# Altium PCB circular coli-6mm.PcbDoc
Units mil, origin at the board's own origin, x right, y up, seen from the top; angles counter-clockwise.
Board outline 668 x 417 mil, 4 copper layers (Top Layer, MidLayer1, MidLayer2, Bottom Layer); 1 components, 1 nets, 2 pads, 2 vias.
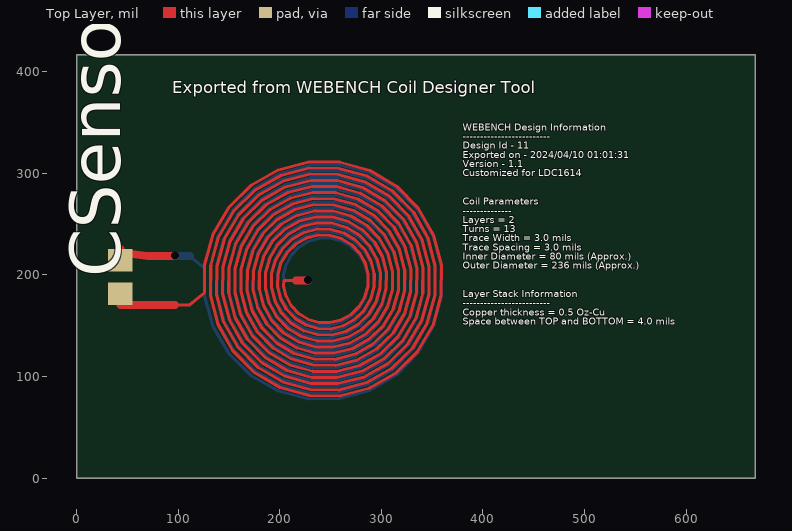
[diagram p0: Top Layer view]
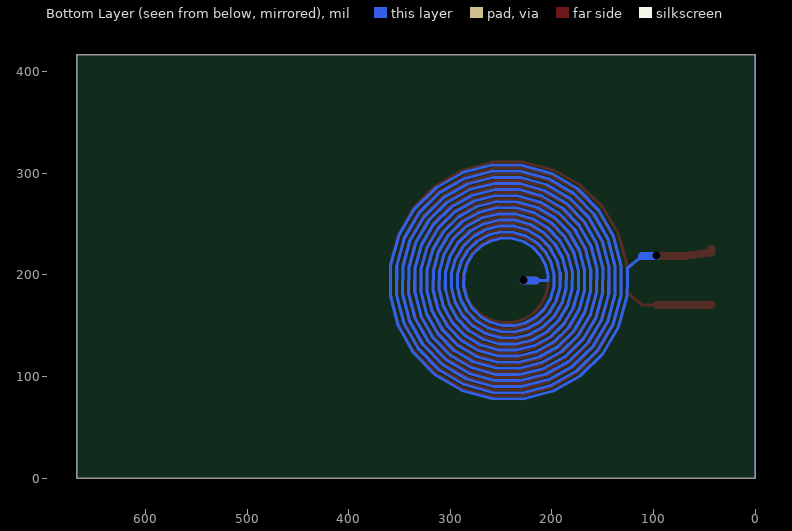
[diagram p1: Bottom Layer view, seen from below]

## Layer stack, top to bottom
Top Layer: signal copper 1.4
Dielectric: core 12.6, FR-4, Dk 4.8
MidLayer1: signal copper 1.4
Dielectric: prepreg 12.6, FR-4, Dk 4.8
MidLayer2: signal copper 1.4
Dielectric: core 12.6, FR-4, Dk 4.8
Bottom Layer: signal copper 1.4

## Board outline
0,0 668,0 668,417 0,417

## Design rules (kind name [scope] priority, off if disabled: settings)
PlaneConnect [All] p0: scope1count=1 scope1_0_kind=Board scope1_0_value=Board scope2count=1 scope2_0_kind=Board scope2_0_value=Board commentlength=0 planeconnectstyle=Direct reliefexpansion=20 reliefentries=4 reliefconductorwidth=10 reliefairgap=10
PlaneConnect [All] p1: planeconnectstyle=Direct reliefexpansion=20 reliefentries=4 reliefconductorwidth=10 reliefairgap=10
PolygonConnect [All] p0: scope1count=1 scope1_0_kind=Board scope1_0_value=Board scope2count=1 scope2_0_kind=Board scope2_0_value=Board commentlength=0 connectstyle=Direct reliefconductorwidth=10 reliefentries=4 polygonreliefangle="90 Angle"
PolygonConnect [All] p1: connectstyle=Direct reliefconductorwidth=10 reliefentries=4 polygonreliefangle="90 Angle"

## Components (designator, comment, footprint, x,y, rotation, side; value= is the part's Value field where it differs from the comment)
CSensor "" 0402 43,198 r90 top

## Footprints (in the part's own frame and the unit in brackets; to place one, negate y for a bottom-side part, rotate by r counter-clockwise, add the part's x,y. Pads: shape width x height; smd on the part's side, far side on the other; paste and mask are expansions set on the pad)
0402 [mil]
  rect 22x24 smd: 1(-16.5,0) 2(16.5,0)

## Via types
v1: diameter 0, hole 8, Top Layer to Bottom Layer, 2 vias

## Nets (pads, with @x,y where several pads share a name; then routed paths per layer and width w, separated by ;. In a path a pad name is that pad's centre, name@x,y a point inside that pad or via, vN(x,y) a via of type N, cw(c..) or ccw(c..) an arc to the next point about the centre after c; other vN are vias at no path point)
3: CSensor.1 CSensor.2 | length 13225.4
  Top Layer w3: 97.06,170.6 111.46,170.6 125.86,182.6 125.86,194.6 126.11,210.11 134.38,239.99 150.06,266.65 172.06,288.3 198.86,303.48 228.61,311.2 259.28,310.95 288.77,302.79 315.09,287.3 336.46,265.58 351.45,239.12 359.06,209.75 358.81,179.48 350.75,150.37 335.46,124.39 314.02,103.3 287.9,88.51 258.92,81 229.04,81.25 200.31,89.21 174.67,104.3 153.86,125.46 139.27,151.24 131.86,179.84 132.11,209.32 139.97,237.67 154.86,262.97 175.75,283.5 201.18,297.89 229.4,305.2 258.49,304.95 286.46,297.19 311.41,282.5 331.66,261.89 345.86,236.81 353.06,208.96 352.81,180.27 345.16,152.68 330.66,128.07 310.33,108.1 285.59,94.1 258.13,87 229.83,87.25 202.62,94.8 178.36,109.1 158.66,129.15 144.86,153.55 137.86,180.63 138.11,208.54 145.56,235.36 159.66,259.28 179.43,278.7 203.49,292.3 230.19,299.2 257.7,298.95 284.14,291.6 307.73,277.7 326.86,258.21 340.27,234.49 347.06,208.17 346.81,181.06 339.57,155 325.86,131.76 306.65,112.9 283.27,99.69 257.34,93 230.62,93.25 204.94,100.39 182.04,113.9 163.46,132.83 150.45,155.87 143.86,181.42 144.11,207.75 151.15,233.04 164.46,255.6 183.11,273.9 205.81,286.71 230.98,293.2 256.91,292.95 281.83,286.01 304.04,272.9 322.06,254.53 334.67,232.17 341.06,207.38 340.81,181.85 333.98,157.31 321.06,135.44 302.97,117.7 280.96,105.28 256.55,99 231.41,99.25 207.26,105.98 185.72,118.7 168.27,136.52 156.04,158.18 149.86,182.21 150.11,206.96 156.74,230.73 169.27,251.92 186.8,269.1 208.12,281.12 231.77,287.2 256.12,286.95 279.51,280.42 300.36,268.1 317.26,250.84 329.08,229.86 335.06,206.59 334.81,182.64 328.38,159.63 316.26,139.13 299.28,122.5 278.64,110.88 255.76,105 232.2,105.25 209.57,111.57 189.41,123.5 173.07,140.2 161.64,160.5 155.86,183 156.11,206.17 162.33,228.41 174.07,248.23 190.48,264.29 210.44,275.53 232.56,281.2 255.33,280.95 277.19,274.83 296.67,263.29 312.46,247.16 323.49,227.54 329.06,205.8 328.81,183.43 322.79,161.95 311.46,142.81 295.6,127.31 276.33,116.47 254.97,111 232.99,111.25 211.89,117.17 193.09,128.31 177.87,143.88 167.23,162.82 161.86,183.79 162.11,205.38 167.93,226.1 178.87,244.55 194.17,259.49 212.76,269.94 233.35,275.2 254.54,274.95 274.88,269.24 292.99,258.49 307.66,243.47 317.9,225.23 323.06,205.01 322.81,184.22 317.2,164.26 306.65,146.49 291.91,132.11 274.01,122.06 254.18,117 233.78,117.25 214.2,122.76 196.78,133.11 182.67,147.57 172.82,165.13 167.86,184.58 168.11,204.59 173.52,223.78 183.67,240.86 197.85,254.69 215.07,264.35 234.14,269.2 253.75,268.95 272.56,263.65 289.3,253.69 302.85,239.79 312.31,222.91 317.06,204.22 316.81,185.01 311.61,166.58 301.85,150.18 288.23,136.91 271.69,127.65 253.39,123 234.57,123.25 216.52,128.35 200.46,137.91 187.47,151.25 178.41,167.45 173.86,185.37 174.11,203.8 179.11,221.46 188.47,237.18 201.54,249.89 217.39,258.76 234.93,263.2 252.96,262.95 270.25,258.06 285.62,248.89 298.05,236.11 306.72,220.59 311.06,203.43 310.81,185.8 306.02,168.89 297.05,153.86 284.55,141.71 269.38,133.24 252.6,129 235.36,129.25 218.84,133.94 204.14,142.71 192.27,154.94 184,169.76 179.86,186.16 180.11,203.01 184.7,219.15 193.27,233.5 205.22,245.09 219.7,253.16 235.72,257.2 252.17,256.95 267.93,252.47 281.94,244.09 293.25,232.42 301.13,218.28 305.06,202.64 304.81,186.59 300.43,171.21 292.25,157.55 280.86,146.51 267.06,138.83 251.81,135 236.15,135.25 221.15,139.53 207.83,147.51 197.07,158.62 189.59,172.08 185.86,186.95 186.11,202.22 190.29,216.83 198.07,229.81 208.9,240.29 222.02,247.57 236.51,251.2 251.38,250.95 265.61,246.87 278.25,239.29 288.45,228.74 295.54,215.96 299.06,201.85 298.81,187.38 294.84,173.53 287.45,161.23 277.18,151.31 264.75,144.42 251.02,141 236.94,141.25 223.47,145.12 211.51,152.31 201.87,162.3 195.18,174.39 191.86,187.74 192.11,201.43 195.88,214.52 202.87,226.13 212.59,235.49 224.34,241.98 237.3,245.2 250.59,244.95 263.3,241.28 274.57,234.49 283.65,225.05 289.95,213.65 293.06,201.06 292.81,188.17 289.25,175.84 282.65,164.91 273.49,156.11 262.43,150.01 250.23,147 237.73,147.25 225.78,150.71 215.2,157.11 206.67,165.99 200.77,176.71 197.86,188.53 198.11,200.64 201.47,212.2 207.67,222.44 216.27,230.69 226.65,236.39 238.09,239.2 249.8,238.95 260.98,235.69 270.88,229.69 278.85,221.37 284.35,211.33 287.06,200.27 286.81,188.96 283.66,178.16 277.85,168.6 269.81,160.91 260.11,155.6 249.44,153 238.52,153.25 228.1,156.3 218.88,161.91 211.48,169.67 206.36,179.03 203.86,189.32 204.11,194.6 215.99,194.6
  Top Layer w8: CSensor.1@43.26,170.6 70.16,170.6 97.06,170.6 ; 43.26,225.6 43.26,222.1 70.16,218.6 97.06,218.6 ; 215.99,194.6 227.86,194.6
  Bottom Layer w3: 111.46,218.6 125.86,206.6 125.86,194.6 126.11,179.09 134.38,149.21 150.06,122.55 172.06,100.9 198.86,85.72 228.61,78 259.28,78.25 288.77,86.41 315.09,101.9 336.46,123.62 351.45,150.08 359.06,179.45 358.81,209.72 350.75,238.83 335.46,264.81 314.02,285.9 287.9,300.69 258.92,308.2 229.04,307.95 200.31,299.99 174.67,284.9 153.86,263.74 139.27,237.96 131.86,209.36 132.11,179.88 139.97,151.53 154.86,126.23 175.75,105.7 201.18,91.31 229.4,84 258.49,84.25 286.46,92.01 311.41,106.7 331.66,127.31 345.86,152.39 353.06,180.24 352.81,208.93 345.16,236.52 330.66,261.13 310.33,281.1 285.59,295.1 258.13,302.2 229.83,301.95 202.62,294.4 178.36,280.1 158.66,260.05 144.86,235.65 137.86,208.57 138.11,180.66 145.56,153.84 159.66,129.92 179.43,110.5 203.49,96.9 230.19,90 257.7,90.25 284.14,97.6 307.73,111.5 326.86,130.99 340.27,154.71 347.06,181.03 346.81,208.14 339.57,234.2 325.86,257.44 306.65,276.3 283.27,289.51 257.34,296.2 230.62,295.95 204.94,288.81 182.04,275.3 163.46,256.37 150.45,233.33 143.86,207.78 144.11,181.45 151.15,156.16 164.46,133.6 183.11,115.3 205.81,102.49 230.98,96 256.91,96.25 281.83,103.19 304.04,116.3 322.06,134.67 334.67,157.03 341.06,181.82 340.81,207.35 333.98,231.89 321.06,253.76 302.97,271.5 280.96,283.92 256.55,290.2 231.41,289.95 207.26,283.22 185.72,270.5 168.27,252.68 156.04,231.02 149.86,206.99 150.11,182.24 156.74,158.47 169.27,137.28 186.8,120.1 208.12,108.08 231.77,102 256.12,102.25 279.51,108.78 300.36,121.1 317.26,138.36 329.08,159.34 335.06,182.61 334.81,206.56 328.38,229.57 316.26,250.07 299.28,266.7 278.64,278.32 255.76,284.2 232.2,283.95 209.57,277.63 189.41,265.7 173.07,249 161.64,228.7 155.86,206.2 156.11,183.03 162.33,160.79 174.07,140.97 190.48,124.91 210.44,113.67 232.56,108 255.33,108.25 277.19,114.37 296.67,125.91 312.46,142.04 323.49,161.66 329.06,183.4 328.81,205.77 322.79,227.25 311.46,246.39 295.6,261.89 276.33,272.73 254.97,278.2 232.99,277.95 211.89,272.03 193.09,260.89 177.87,245.32 167.23,226.38 161.86,205.41 162.11,183.82 167.93,163.1 178.87,144.65 194.17,129.71 212.76,119.26 233.35,114 254.54,114.25 274.88,119.96 292.99,130.71 307.66,145.73 317.9,163.97 323.06,184.19 322.81,204.98 317.2,224.94 306.65,242.71 291.91,257.09 274.01,267.14 254.18,272.2 233.78,271.95 214.2,266.44 196.78,256.09 182.67,241.63 172.82,224.07 167.86,204.62 168.11,184.61 173.52,165.42 183.67,148.34 197.85,134.51 215.07,124.85 234.14,120 253.75,120.25 272.56,125.55 289.3,135.51 302.85,149.41 312.31,166.29 317.06,184.98 316.81,204.19 311.61,222.62 301.85,239.02 288.23,252.29 271.69,261.55 253.39,266.2 234.57,265.95 216.52,260.85 200.46,251.29 187.47,237.95 178.41,221.75 173.86,203.83 174.11,185.4 179.11,167.74 188.47,152.02 201.54,139.31 217.39,130.44 234.93,126 252.96,126.25 270.25,131.14 285.62,140.31 298.05,153.09 306.72,168.61 311.06,185.77 310.81,203.4 306.02,220.31 297.05,235.34 284.55,247.49 269.38,255.96 252.6,260.2 235.36,259.95 218.84,255.26 204.14,246.49 192.27,234.26 184,219.44 179.86,203.04 180.11,186.19 184.7,170.05 193.27,155.7 205.22,144.11 219.7,136.04 235.72,132 252.17,132.25 267.93,136.73 281.94,145.11 293.25,156.78 301.13,170.92 305.06,186.56 304.81,202.61 300.43,217.99 292.25,231.65 280.86,242.69 267.06,250.37 251.81,254.2 236.15,253.95 221.15,249.67 207.83,241.69 197.07,230.58 189.59,217.12 185.86,202.25 186.11,186.98 190.29,172.37 198.07,159.39 208.9,148.91 222.02,141.63 236.51,138 251.38,138.25 265.61,142.33 278.25,149.91 288.45,160.46 295.54,173.24 299.06,187.35 298.81,201.82 294.84,215.67 287.45,227.97 277.18,237.89 264.75,244.78 251.02,248.2 236.94,247.95 223.47,244.08 211.51,236.89 201.87,226.9 195.18,214.81 191.86,201.46 192.11,187.77 195.88,174.68 202.87,163.07 212.59,153.71 224.34,147.22 237.3,144 250.59,144.25 263.3,147.92 274.57,154.71 283.65,164.15 289.95,175.55 293.06,188.14 292.81,201.03 289.25,213.36 282.65,224.29 273.49,233.09 262.43,239.19 250.23,242.2 237.73,241.95 225.78,238.49 215.2,232.09 206.67,223.21 200.77,212.49 197.86,200.67 198.11,188.56 201.47,177 207.67,166.76 216.27,158.51 226.65,152.81 238.09,150 249.8,150.25 260.98,153.51 270.88,159.51 278.85,167.83 284.35,177.87 287.06,188.93 286.81,200.24 283.66,211.04 277.85,220.6 269.81,228.29 260.11,233.6 249.44,236.2 238.52,235.95 228.1,232.9 218.88,227.29 211.48,219.53 206.36,210.17 203.86,199.88 204.11,194.6 215.99,194.6
  Bottom Layer w8: 97.06,218.6 111.46,218.6 ; 215.99,194.6 227.86,194.6
  other v1: 228,195 97,219

## Other copper
Multi-Layer:
  the board outline again, w1

## Silkscreen, mask and mechanical layers (free items; w line width, h text height)
Top Overlay:
  text "Exported from WEBENCH Coil Designer Tool" at 94,379 h12
  text "WEBENCH Design Information" at 380,342 h7
  text "-------------------------" at 380,333 h7
  text "Design Id - 11" at 380,324 h7
  text "Exported on - 2024/04/10 01:01:31" at 380,315 h7
  text "Version - 1.1" at 380,306 h7
  text "Customized for LDC1614" at 380,297 h7
  text "Coil Parameters" at 380,269 h7
  text "--------------" at 380,260 h7
  text "Layers = 2" at 380,251 h7
  text "Turns = 13" at 380,242 h7
  text "Trace Width = 3.0 mils" at 380,233 h7
  text "Trace Spacing = 3.0 mils" at 380,224 h7
  text "Inner Diameter = 80 mils (Approx.)" at 380,215 h7
  text "Outer Diameter = 236 mils (Approx.)" at 380,206 h7
  text "Layer Stack Information" at 380,178 h7
  text "-------------------------" at 380,169 h7
  text "Copper thickness = 0.5 Oz-Cu" at 380,160 h7
  text "Space between TOP and BOTTOM = 4.0 mils" at 380,151 h7